# Altium PCB PCB_combo_ver2.PcbDoc
Units mm, origin at the board's own origin, x right, y up, seen from the top; angles counter-clockwise.
Board outline 175 x 85 mm, 2 copper layers (Top Layer, Bottom Layer); 57 components, 37 nets, 169 pads, 7 vias.
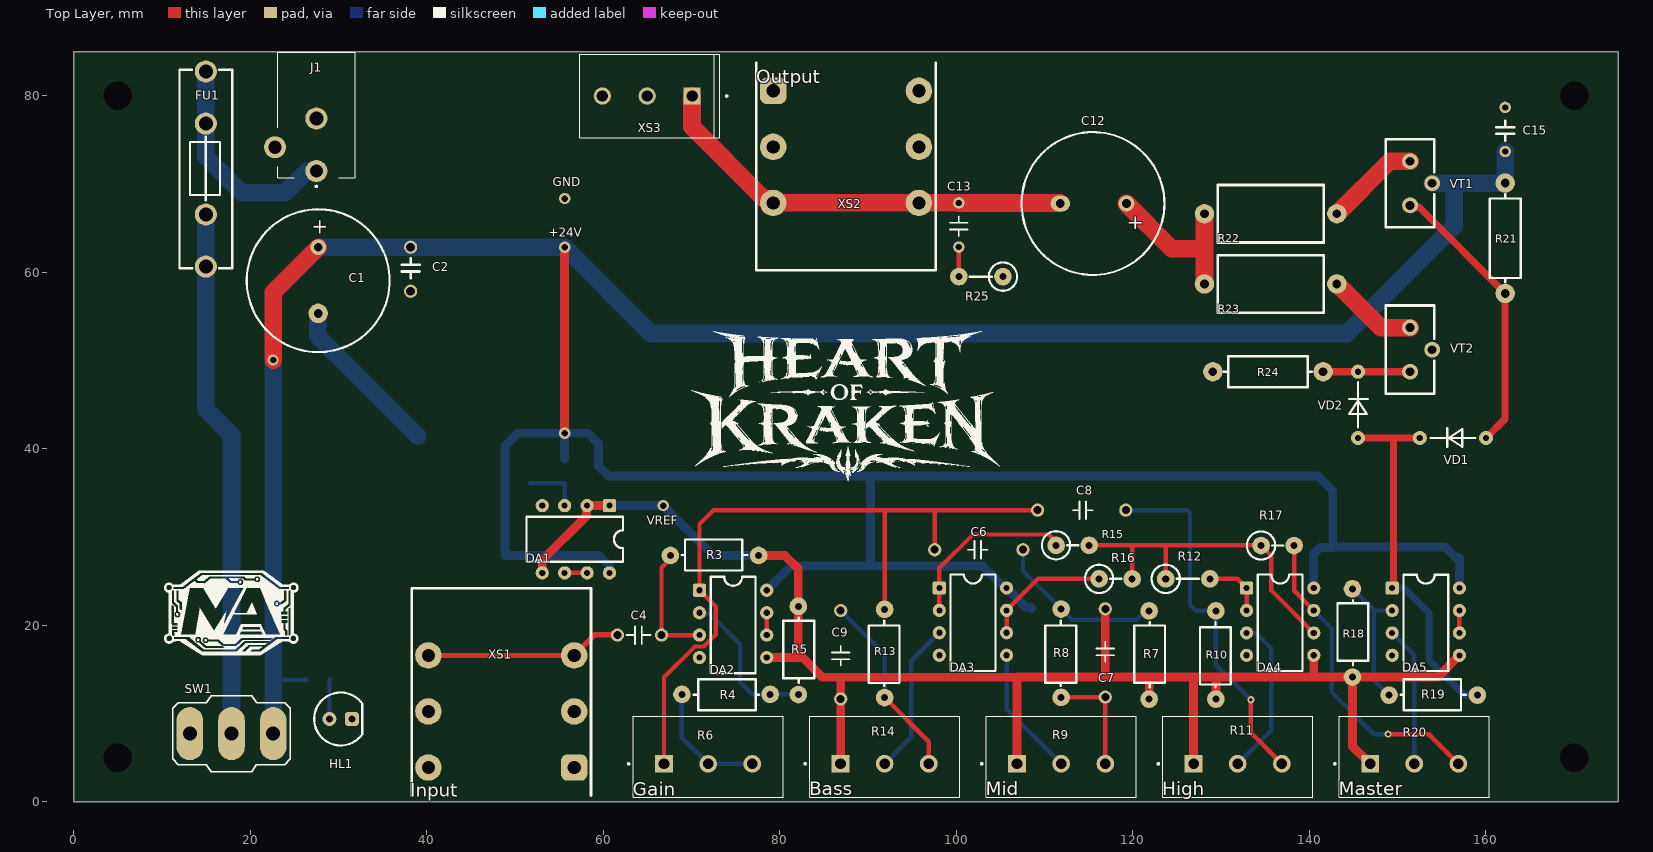
[diagram p0: Top Layer view]
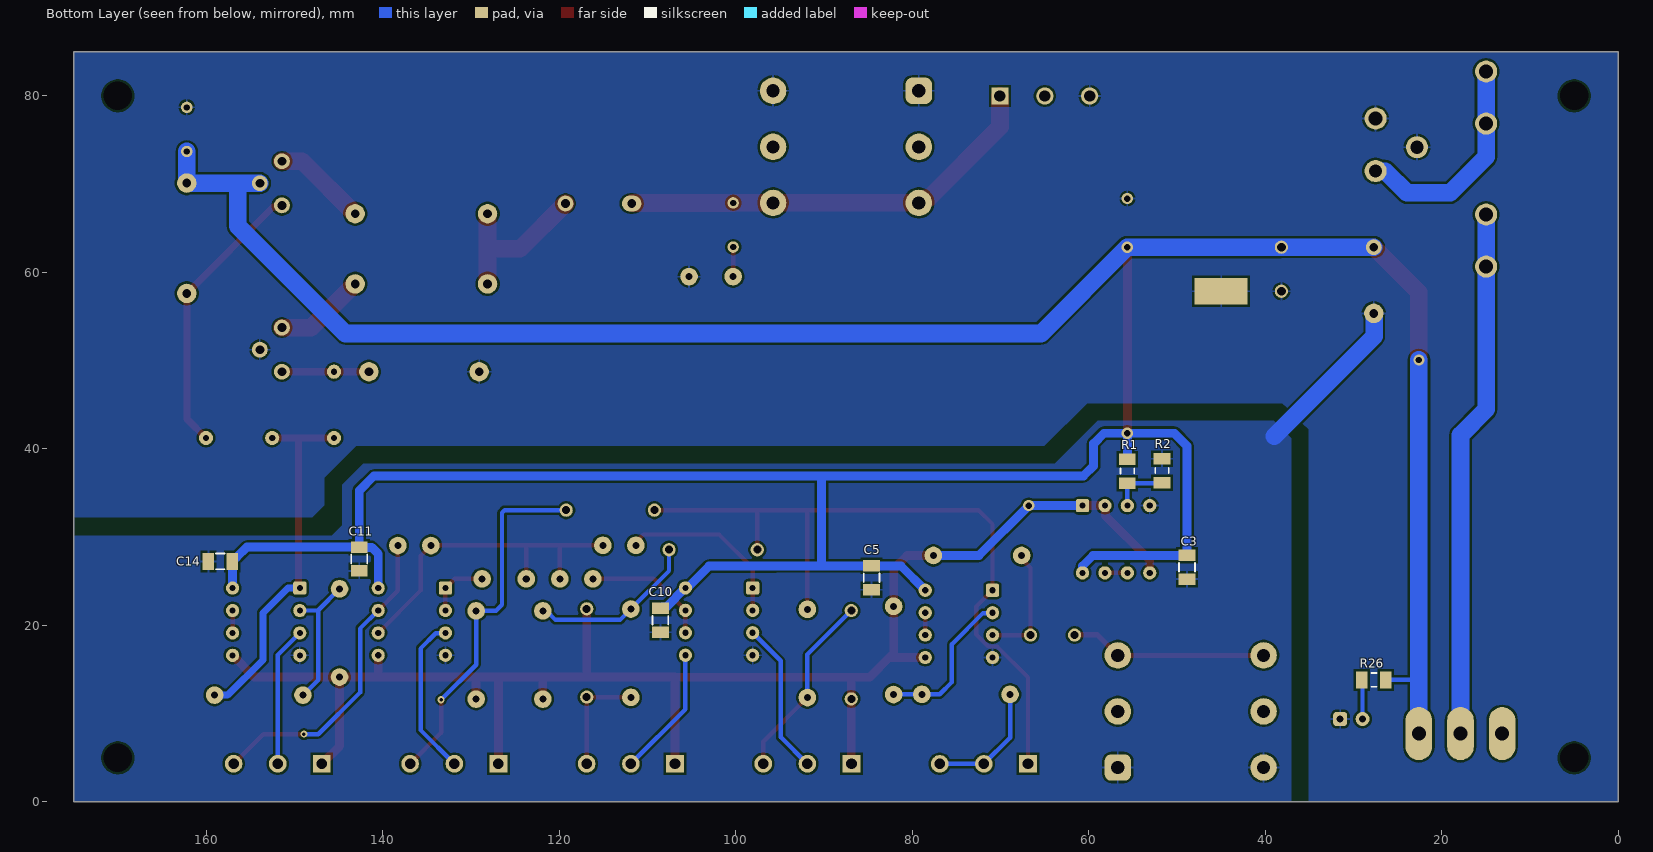
[diagram p1: Bottom Layer view, seen from below]
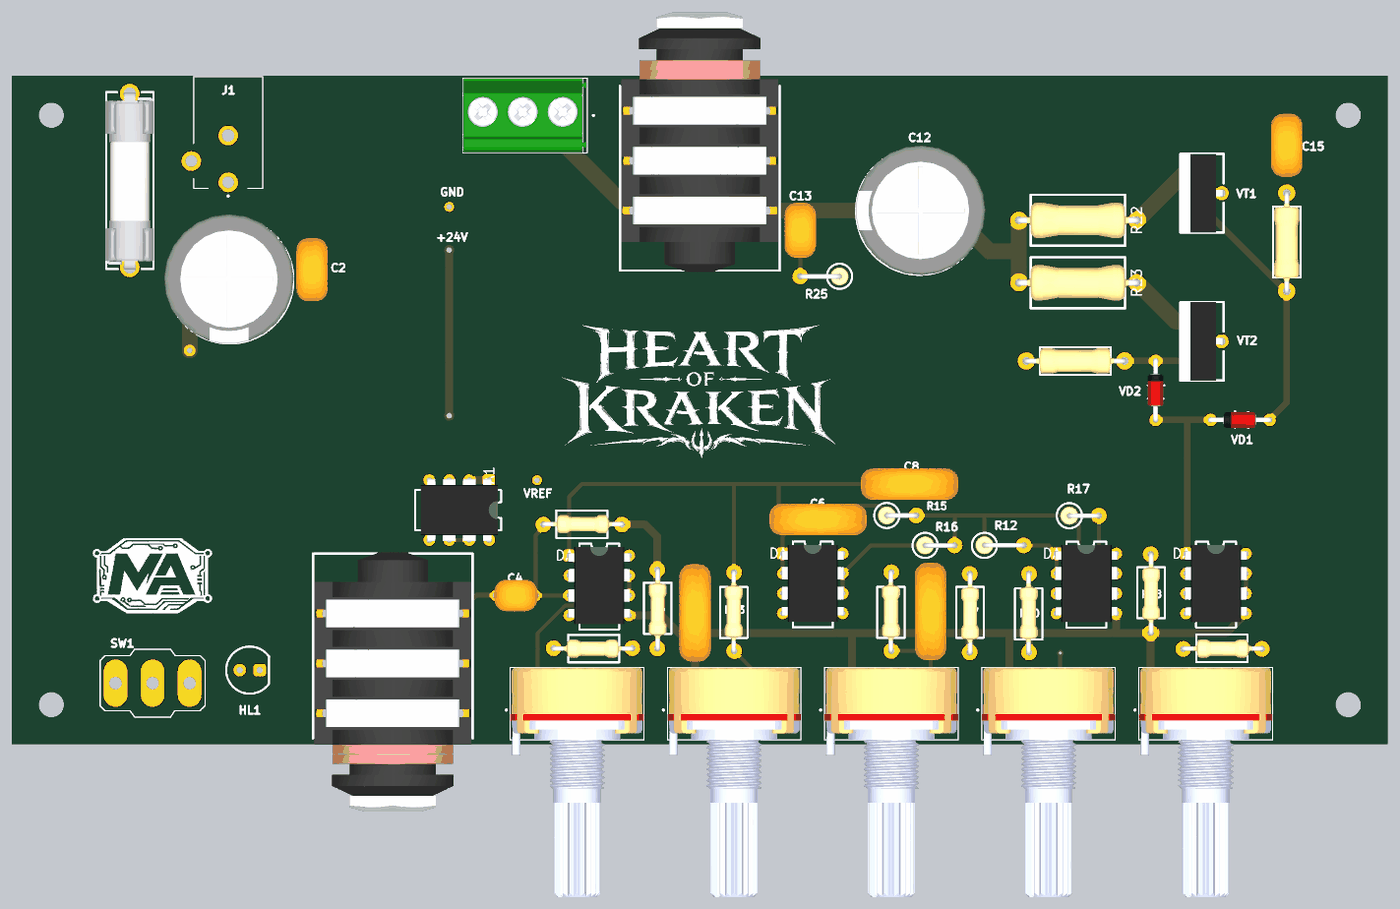
[diagram p2: 3D render of the assembled board from above, using the file's embedded part models]
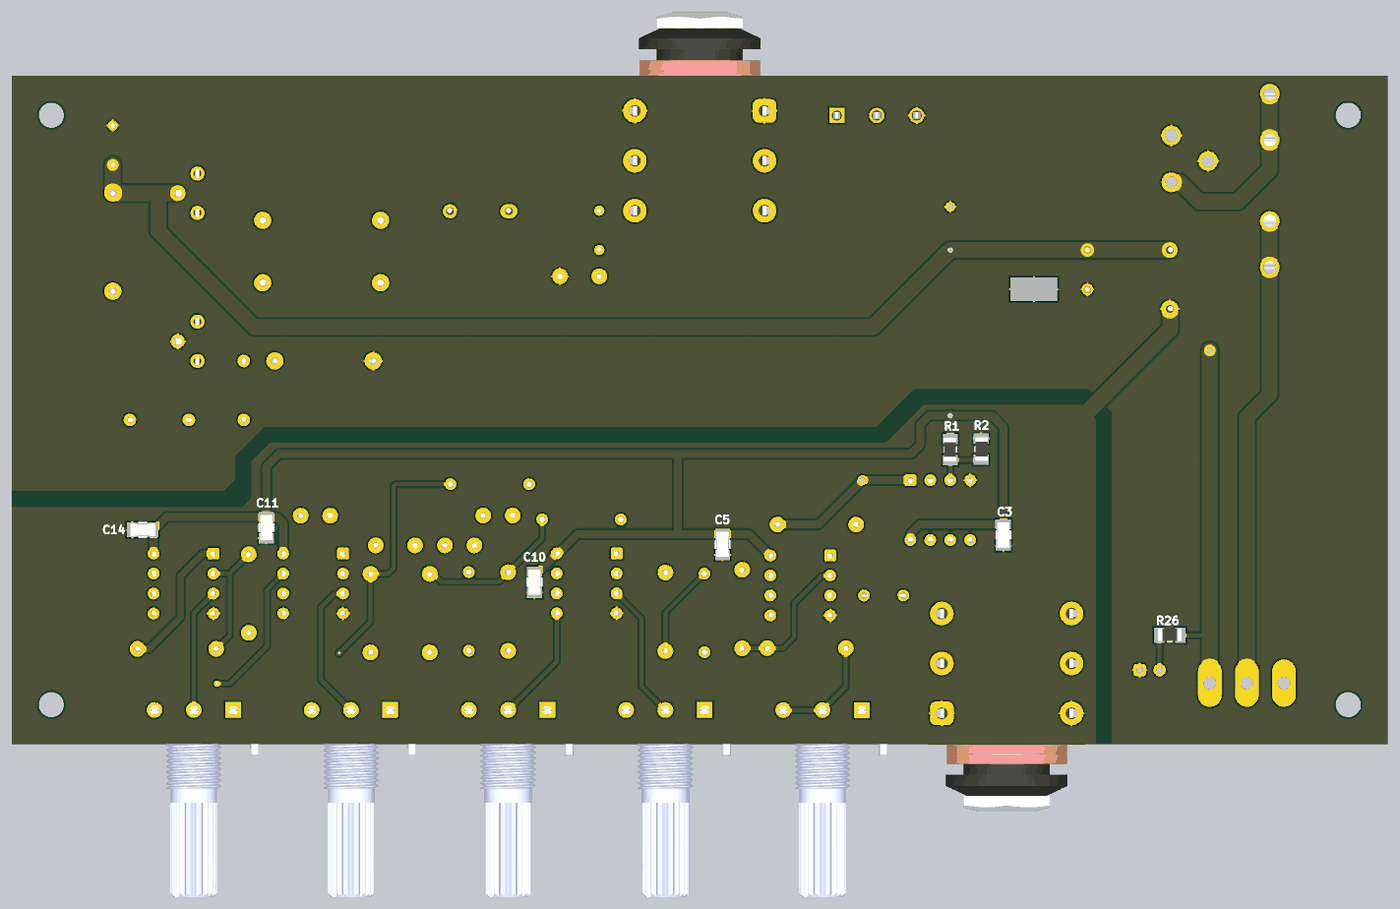
[diagram p3: 3D render of the assembled board from below, using the file's embedded part models]

## Layer stack, top to bottom
Top Solder: solder mask 0.0102, Solder Resist, Dk 3.5
Top Layer: signal copper 0.0356
Dielectric 1: dielectric 0.32, FR-4, Dk 4.8
Bottom Layer: signal copper 0.0356
Bottom Solder: solder mask 0.0102, Solder Resist, Dk 3.5

## Board outline
0,0 175,0 175,85 0,85

## Design rules (kind name [scope] priority, off if disabled: settings)
Clearance [All] p1: gap=0.254 ignorepadtopadclearanceinfootprint=FALSE
Height [All] p1: minheight=0 maxheight=45 prefheight=12.7
PolygonConnect [All] p1: connectstyle=Relief reliefconductorwidth=0.254 reliefentries=4 polygonreliefangle="90 Angle" airgapwidth=0.254
RoutingVias [All] p1: holewidth=0.711 width=1.27 viastyle="Through Hole" minholewidth=0.711 minwidth=1.27 maxholewidth=0.711 maxwidth=1.27
SolderMaskExpansion [All] p1: expansion=0.102 istentingtop=FALSE
SupplyNets "Schematic Supply Nets" [InNet('GND')] p1: voltage=0.000
Width [All] p1: maxlimit=3 minlimit=0.254 preferedwidth=0.5
29 further rules are at their usual default settings.

## Components (designator, comment, footprint, x,y, rotation, side; value= is the part's Value field where it differs from the comment)
C1 "2200uF 35V" "capr- 7.5D16.5H35"#1 27.704,55.35 r270 top
C2 "100nF 50V" "C__s 5-d 8-t4"#1 38.175,62.85 r270 top
C3 "100nF" "cap 1206 3D" 48.875,27.925 r180 bottom
C4 "1uF" "C__s 5-d 5.5-t4" 66.6,18.9 r180 top
C5 "100nF" "cap 1206 3D" 84.6,26.725 r180 bottom
C6 "47nF" C__s10-d12.4-t4 97.55,28.575 r0 top
C7 "2.2nF" C__s10-d12.4-t4 116.875,21.875 r270 top
C8 "2.2nF" C__s10-d12.4-t4 119.204,33.057 r180 top
C9 "47nF" C__s10-d12.4-t4 86.9,11.675 r90 top
C10 "100nF" "cap 1206 3D" 108.525,21.9 r180 bottom
C11 "100nF" "cap 1206 3D" 142.65,28.85 r180 bottom
C12 "2200uF 35V" "capr- 7.5D16.5H35"#2 111.781,67.792 r180 top
C13 "100nF" "C__s 5-d 7-t4" 100.282,67.862 r270 top
C14 "100nF" "cap 1206 3D" 157.05,27.25 r270 bottom
C15 "100nF 50V" "C__s 5-d 8-t4"#2 162.182,73.687 r90 top
DA1 "ОУ х 2 (1)" DIP-8 60.705,33.57 r270 top
DA2 "ОУ х 2 (1)" DIP-8 70.9,23.98 r0 top
DA3 "ОУ х 2 (1)" DIP-8 98.075,24.245 r0 top
DA4 "ОУ х 2 (1)" DIP-8 132.88,24.23 r0 top
DA5 "ОУ х 2 (1)" DIP-8 149.375,24.225 r0 top
FU1 "1.6A 5x20 mm" FU_FC-001-N(DH) 14.975,82.75 r270 top
HL1 "???" "СД_D5_8.6_Y кр" 31.515,9.4 r180 top
J1 "EJ508A" MPD_EJ508A 27.5,74.175 r180 top
R1 "10K" "Res_1206 3D" 55.625,36.175 r0 bottom
R2 "10K" "Res_1206 3D" 51.7,38.825 r180 bottom
R3 "10K" "RES 0.25  L10" 77.6,27.925 r270 top
R4 "10K" "RES 0.25  L10" 68.914,12.192 r90 top
R5 "10K" "RES 0.25  L10" 82.097,12.165 r180 top
R6 "50K" TRIM_WH148-1A-2-18T-L20 71.882,4.318 r0 top
R7 "9.1K" "RES 0.25  L10" 121.85,11.65 r180 top
R8 "7.5K" "RES 0.25  L10" 111.875,21.85 r0 top
R9 "50K" TRIM_WH148-1A-2-18T-L20 111.875,4.325 r0 top
R10 "10K" "RES 0.25  L10" 129.4,21.65 r0 top
R11 "50K" TRIM_WH148-1A-2-18T-L20 131.875,4.325 r0 top
R12 "9.1K" "RES 0.25  L 5" 123.725,25.275 r90 top
R13 "7.5K" "RES 0.25  L10" 91.875,21.825 r0 top
R14 "50K" TRIM_WH148-1A-2-18T-L20 91.875,4.325 r0 top
R15 "6.8K" "RES 0.25  L 3,75" 111.3,29.075 r90 top
R16 "7.5K" "RES 0.25  L 3,75" 116.175,25.275 r90 top
R17 "10K" "RES 0.25  L 3,75" 134.525,29.05 r90 top
R18 "10K" "RES 0.25  L10" 144.875,14.146 r180 top
R19 "22K" "RES 0.25  L10" 159.025,12.1 r270 top
R20 "50K" TRIM_WH148-1A-2-18T-L20 151.875,4.325 r0 top
R21 "330R" "RES 0.5  L12,5" 162.182,57.612 r180 top
R22 "0.47R" "RES 1,0  L15" 143.107,66.637 r270 top
R23 "0.47R" "RES 1,0  L15" 143.107,58.687 r270 top
R24 "330R" "RES 0.5  L12,5" 129.057,48.737 r90 top
R25 "10R" "RES 0.25  L 5" 105.282,59.512 r270 top
R26 "10K" "Res_1206 3D" 29,13.825 r90 bottom
SW1 "MTS103" MTS103 17.882,7.737 r90 top
VD1 "Диод.  x1  (2)" "DO-35  (7.5)" 160.007,41.237 r180 top
VD2 "Диод.  x1  (2)" "DO-35  (7.5)" 145.507,41.237 r90 top
VT1 "VT NPN" "TO-220 (Z)" 151.407,67.587 r90 top
VT2 "VT PNP" "TO-220 (Z)" 151.407,48.737 r90 top
XS1 "NYS215" "Гнездо  NYS215" 56.7,3.9 r0 top
XS2 "NYS215" "Гнездо  NYS215" 79.25,80.562 r180 top
XS3 "MKDSN2,5/3-5.08" PHOENIX_MKDSN2,5/3-5.08 64.975,79.975 r180 top

## Footprints (in the part's own frame and the unit in brackets; to place one, negate y for a bottom-side part, rotate by r counter-clockwise, add the part's x,y. Pads: shape width x height; smd on the part's side, far side on the other; paste and mask are expansions set on the pad)
C__s10-d12.4-t4 [mm] "Конденсатор керамический дисковый"
  round 1.5 hole 0.9 mask+0.1: 1(0,0) 2(10,0)
  silkscreen extent 3.75,-1 6,1, body extent -1.2,-2 11.2,2, height 15.3
"C__s 5-d 5.5-t4" [mm] "Конденсатор керамический дисковый"
  round 1.5 hole 0.9 mask+0.1: 1(0,0) 2(5,0)
  silkscreen extent 1.25,-1 4,1, body extent -0.25,-2 5.25,2, height 8.45
"C__s 5-d 7-t4" [mm] "Конденсатор керамический дисковый"
  round 1.3 hole 0.7 mask+0.1: 1(0,0) 2(5,0)
  silkscreen extent 1.5,-1 3.75,1, body extent -1,-2 6,2, height 9.95
"C__s 5-d 8-t4"#1 [mm] "Конденсатор керамический дисковый"
  round 1.5 hole 1 mask+0.1: 1(0,0) 2(5,0)
  silkscreen extent 1.25,-1 3.5,1, body extent -1.5,-2 6.5,2, height 11
"C__s 5-d 8-t4"#2 [mm] "Конденсатор керамический дисковый"
  round 1.3 hole 0.7 mask+0.1: 1(0,0) 2(5,0)
  silkscreen extent 1.25,-1 3.5,1, body extent -1.5,-2 6.5,2, height 11
"cap 1206 3D" [mm] "Конденсатор керамический ЧИП (SMD)"
  rect 1.9x1.3 smd: 1(0,0.025) 2(0,-2.675)
  silkscreen extent -0.9,-1.83 0.9,-0.83, body extent -0.8,-2.93 0.8,0.27, height 1.4
"capr- 7.5D16.5H35"#1 [mm] "Конденсатор электролитический алюминиевый"
  round 2.2 hole 1: 1(0,0)
  round 1.8 hole 1: 2(-7.5,0)
  silkscreen extent -11.79,-8.09 4.39,8.09, body extent -12.05,-8.35 4.45,8.15, height 35.5
"capr- 7.5D16.5H35"#2 [mm] "Конденсатор электролитический алюминиевый"
  oval 2.2x1.8 hole 1: 1(0,0)
  round 1.8 hole 1: 2(-7.5,0)
  silkscreen extent -11.79,-8.09 4.39,8.09, body extent -12.05,-8.35 4.45,8.15, height 35.5
DIP-8 [mm]
  rrect30% 1.5x1.5 hole 0.7: 1(0,0)
  round 1.5 hole 0.7: 2(0,-2.54) 3(0,-5.08) 4(0,-7.62) 5(7.62,-7.62) 6(7.62,-5.08) 7(7.62,-2.54) 8(7.62,0)
  silkscreen extent 1.27,-9.4 6.35,1.52, body extent -0.15,-8.71 7.77,1.09, height 4.4
"DO-35  (7.5)" [mm]
  round 1.6 hole 0.7: 1(7.5,0) 2(0,0)
  silkscreen extent 1.2,-1.1 6.3,1, body extent -0.25,-1 7.85,1, height 2
FU_FC-001-N(DH) [mm]
  round 2.5 hole 1.6: 1(0,0) 1(5.9,0) 2(16.2,0) 2(22.1,0)
  silkscreen extent -0.2,-3 22.3,3, body extent -0.15,-3.1 22.35,3.1, height 10.1
MPD_EJ508A [mm]
  round 2.5 hole 1.5: 1(0,2.705) 3(4.69,0)
  round 2.5 hole 1.6: 2(0,-3.25)
  silkscreen extent -4.4,-10.74 4.4,4.55
MTS103 [mil]
  oval 237x118.5 hole 62.99: 1(0,185.56) 2(0,0) 3(0,-185.56)
  silkscreen extent -170,-263 170,263
PHOENIX_MKDSN2,5/3-5.08 [mm]
  rect 1.95x1.95 / inner round 1.95 / far side rect 1.95x1.95 hole 1.3: 1(-5.08,0)
  round 1.95 hole 1.3: 2(0,0) 3(5.08,0)
  silkscreen extent -9.1,-4.75 7.62,4.75, body extent -8.19,-4.75 7.62,4.75, height 15.15
"RES 0.5  L12,5" [mm] "Резистор  МЛТ,  ОМЛТ,  С2-33Н"
  round 2.2 hole 1: 1(0,0) 2(0,-12.5)
  silkscreen extent -1.75,-11.25 1.75,-1.25, body extent -1.6,-12.75 1.6,0.35, height 4.97
"RES 0.25  L10" [mm] "Резистор  МЛТ,  ОМЛТ,  С2-33Н"
  round 2 hole 0.8: 1(0,0) 2(0,-10)
  silkscreen extent -1.8,-8.7 1.7,-1.3, body extent -1.2,-10.27 1.1,0.33, height 3.64
"RES 0.25  L 3,75" [mm] "Резистор  МЛТ,  ОМЛТ,  С2-33Н"
  round 2 hole 0.8: 1(0,0) 2(0,-3.75)
  silkscreen extent -1.6,-2.5 1.6,1.6, body extent -1.15,-4.05 1.15,1.15, height 11.3
"RES 0.25  L 5" [mm] "Резистор  МЛТ,  ОМЛТ,  С2-33Н"
  round 2 hole 0.8: 1(0,0) 2(0,-5)
  silkscreen extent -1.6,-3.75 1.6,1.6, body extent -1.13,-5.3 1.18,1.15, height 10.8
"RES 1,0  L15" [mm] "Резистор  МЛТ,  ОМЛТ,  С2-33Н"
  round 2.2 hole 1: 1(0,0) 2(0,-15)
  silkscreen extent -3.25,-13.5 3.25,-1.5, body extent -2.25,-15.4 2.25,0.4, height 5.75
"Res_1206 3D" [mm] "Резистор ЧИП (SMD)"
  rect 1.9x1.3 smd: 1(0,0.05) 2(0,-2.65)
  silkscreen extent -0.77,-1.6 0.78,-1, body extent -0.75,-2.8 0.85,0.2, height 0.63
"TO-220 (Z)" [mm] "TO-220AB   SC-46   2-10P1B"
  round 1.8 hole 1: 1(0,0) 2(2.5,-2.5) 3(5,0)
  silkscreen extent -2.5,-2.75 7.5,2.75, body extent -2.5,-2.75 7.51,2.76, height 26
TRIM_WH148-1A-2-18T-L20 [mm]
  rect 2x2 / inner round 2 / far side rect 2x2 hole 1.2 mask+0.102: 1(-5,0)
  round 2 hole 1.2 mask+0.102: 2(0,0) 3(5,0)
  silkscreen extent -9.1,-3.8 8.5,5.4, body extent -8.5,-23.8 8.5,5.4, height 21
"Гнездо  NYS215" [mm]
  rrect50% 3x3 hole 1.5: 1(0,0)
  round 3 hole 1.5: 2(0,6.35) 3(0,12.7) 4(-16.51,12.7) 5(-16.51,6.35) 6(-16.51,0)
  silkscreen extent -18.41,-3.17 1.91,20.32, body extent -18.25,-12.52 1.75,20.5, height 15.75
"СД_D5_8.6_Y кр" [mm] "Светодиод красный D5 H8.6  горизонт."
  rrect50% 1.6x1.6 hole 0.8: 1(0,0)
  round 1.6 hole 0.8: 2(2.54,0)
  silkscreen extent -1.19,-3 4.27,3, body extent -1.23,-0.2 4.27,13.68, height 6.46

## Part data
C1 C12: library part "C Al R", "Конденсатор алюминиевый радиальный"
C2 C4 C6 C7 C8 C9 C13 C15: library part C_Disk, "Конденсатор керамика"
C3 C5 C10 C11 C14: library part C, "Конденсатор керамика"
DA1 DA2 DA3 DA4 DA5: "NJM4558/4559  LM158х   LM258х   LM358х   LM2904х  TL072х   NE5532x   SA5532x  и другие"
FU1: library part "FU + Clip", "Предохранитель плавкий с держателем."
HL1: library part "D5  H8.6", "Св. д. D5 H8.6"
J1: "Power Barrel Connector Jack 2.10mm ID _0.083_, 5.50mm OD _0.217_ Through Hole, Right Angle", Package="Non-Standard MPD", Availability=Unavailable, MF=MPD, MP=EJ508A, Price=None, SnapEDA_Link=https://www.snapeda.com/parts/EJ508A/MPD%20%28Memory%20Protection%20Devices%29/view-part/474399/?ref=snap
R1 R2 R3 R26: library part R, "0805 10K"
R4 R5 R7 R8 R10 R12 R13 R15 R16 R17 R21 R22 R23 R24 R25: library part R, "R4"
R6 R9 R11 R14 R20: library part WH148-1A-2-18T-L20, "16mm Rotary Potentiometers", Package=Package, Check_prices=https://www.snapeda.com/parts/WH148-1A-2-18T-L20/Kls+electronics/view-part/?ref=eda, MF="Kls electronics", MP=WH148-1A-2-18T-L20, SnapEDA_Link=https://www.snapeda.com/parts/WH148-1A-2-18T-L20/Kls+electronics/view-part/?ref=snap
R18 R19: library part R, "Резисторы плёночные (SMD; МЛТ; С2-33Н; MP9xxx)"
SW1: "SW TOG 1P2T 6A ON-OFF-ON MINI SOL THR", Package=None, Check_prices=https://www.snapeda.com/parts/MTS-103/CIF/view-part/?ref=eda, MF="Not Specified", MP=MTS-103, SnapEDA_Link=https://www.snapeda.com/parts/MTS-103/CIF/view-part/?ref=snap
VD1 VD2: "Диод  одиночный"
VT1: "Транзистор NPN"
VT2: "Транзистор PNP"
XS1 XS2: library part "NYS 215", "Гнездо аудио стерео"
XS3: "HEADER, PCB, SCREW, 5.08MM, 3WAY; Connector Type: PCB; Series: MKDSN 2, 5; Connector Mounting: PCB; Pitch Spacing: 5....", Package=None, Availability="Not in stock", Check_prices=https://www.snapeda.com/parts/MKDSN2,5/3-5.08/Phoenix+Contact/view-part/?ref=eda, MF="Phoenix Contact", MP=MKDSN2,5/3-5.08, Price=None, SnapEDA_Link=https://www.snapeda.com/parts/MKDSN2,5/3-5.08/Phoenix+Contact/view-part/?ref=snap

## Free pads (board coordinates)
  round 0 hole 3.2 unplated: 25(5,5) 25(5,80) 25(170,5) 25(170,80)
  rect 6x3 smd far side: 38(45,57.85)

## Via types
v1: diameter 1.27, hole 0.711, Top Layer to Bottom Layer, 4 vias
v2: diameter 1.27, hole 0.711, Top Layer to Bottom Layer, tented both sides, 1 vias
v3: diameter 0.8, hole 0.4, Top Layer to Bottom Layer, 1 vias
v4: diameter 0.8, hole 0.4, Top Layer to Bottom Layer, tented both sides, 1 vias

## Nets (pads, with @x,y where several pads share a name; then routed paths per layer and width w, separated by ;. In a path a pad name is that pad's centre, name@x,y a point inside that pad or via, vN(x,y) a via of type N, cw(c..) or ccw(c..) an arc to the next point about the centre after c; other vN are vias at no path point)
+24: C1.2 C2.1 C3.1 C5.1 C10.1 C11.1 C14.1 C15.1 DA1.8 DA2.8 DA3.8 DA4.8 DA5.8 R1.2 R21.2 R26.2 SW1.3 VT1.2 | length 437.7
  Top Layer w1: v2(55.625,41.775) v1(55.625,62.85)
  Top Layer w2: v1(22.6,50.075) 22.6,57.746 C1.2
  Bottom Layer w0.5: SW1.3 SW1.3@22.598,7.739 ; v1@22.598,50.073 v1(22.6,50.075) ; 22.695,13.825 R26.2 ; C11.1@142.618,28.843 C11.1 ; VT1.2 VT1.2@153.919,70.099 ; R21.2@162.169,70.099 R21.2
  Bottom Layer w1: R1.2 v2(55.625,41.775) ; DA1.8 60.705,26.735 59.515,27.925 48.875,27.925 48.875,40.35 50.3,41.775 v2(55.625,41.775) ; DA2.8 81.265,26.725 84.15,26.725 95.4,26.725 103.005,26.725 105.235,24.495 105.31,24.495 105.56,24.245 DA3.8 107.865,22.075 108.375,22.075 C10.1 ; 90.275,26.75 90.275,36.925 ; DA4.8 140.5,28.1 141.243,28.843 C11.1@142.618,28.843 ; DA5.8 156.995,27.58 156.875,27.7 156.545,27.7 155.37,28.875 C11.1 142.65,35.275 141,36.925 90.275,36.925 ; v2(55.625,41.775) 58.275,41.775 59.45,40.6 59.45,38.075 60.6,36.925 90.275,36.925
  Bottom Layer w2: SW1.3@22.598,7.739 v1@22.598,50.073 ; C1.2 C2.1 v1(55.625,62.85) 65.413,53.062 144.207,53.062 156.4,65.255 156.4,70.05 ; VT1.2@153.919,70.099 R21.2@162.169,70.099 ; R21.2 C15.1
GND: C1.1 C2.2 C3.2 C5.2 C10.2 C11.2 C14.2 C15.2 DA1.4 DA2.4 DA3.4 DA4.4 DA5.4 HL1.1 J1.2 J1.3 pad.38 R2.1 R24.1 R25.1 VT2.2 XS1.1 XS1.6 XS2.1 XS2.6 XS3.3 | length 18.6
  Bottom Layer w2: C1.1@27.65,55.35 27.65,52.75 38.975,41.425
  other v1: 55.625,68.35
HPF1: DA4.3 R11.2 | length 18.2
  Bottom Layer w0.5: R11.2 135.7,8.15 135.7,17.375 133.963,19.112 132.918,19.112 DA4.3
HPF2: DA4.6 R12.1 R15.2 R16.2 R17.1 | length 39.5
  Top Layer w0.5: R15.2 119.95,29.075 ; R16.2 119.925,29.05 119.95,29.075 ; R12.1 123.725,29.025 123.675,29.075 ; R17.1@134.5,29.075 123.675,29.075 ; R17.1 135.7,27.875 135.7,23.95 DA4.6 ; 119.95,29.075 123.675,29.075
LPF1: DA3.3 R14.2 | length 17.4
  Bottom Layer w0.5: R14.2 94.9,7.35 94.9,15.99 DA3.3
MPF1: DA3.5 R9.2 | length 14.9
  Bottom Layer w0.5: DA3.5 105.695,10.505 R9.2
NetC4_1: C4.1 DA2.3 R3.2 | length 13.7
  Top Layer w0.5: R3.2 67.6,27.519 66.6,26.519 C4.1 DA2.3
NetC4_2: C4.2 XS1.3 XS1.4 | length 22.4
  Top Layer w0.6: XS1.4 XS1.3 59.025,18.925 C4.2@61.6,18.925
NetC6_2: C6.2 R7.2 R8.1 | length 19.4
  Bottom Layer w0.5: C6.2 107.55,26.175 R8.1 113.104,20.621 120.415,20.621 121.444,21.65 R7.2
NetC7_2: C7.2 R8.2 R9.3 | length 12.6
  Top Layer w0.5: R8.2 111.888,11.863 116.863,11.863 C7.2 R9.3
NetC8_1: C8.1 R10.1 R11.3 | length 41.5
  Top Layer w0.5: v4(133.375,11.575) 133.375,7.825 R11.3
  Bottom Layer w0.5: C8.1 126.182,33.057 126.475,32.764 126.475,22.325 127.15,21.65 R10.1 129.4,15.55 v4(133.375,11.575)
NetC9_2: C9.2 R13.2 R14.3 | length 21.5
  Top Layer w0.5: R13.2 96.875,6.825 R14.3
  Bottom Layer w0.5: C9.2 91.875,16.7 R13.2
NetC12_1: C12.1 C13.1 XS2.3 XS2.4 XS3.1 | length 48.7
  Top Layer w2: XS3.1 70.055,76.489 78.144,68.4 78.479,68.4 78.979,67.9 95.76,67.9 C13.1@100.282,67.9 ; C13.1 C12.1@111.681,67.862
NetC12_2: C12.2 R22.2 R23.2 | length 18.9
  Top Layer w2: C12.2 124.411,62.662 128.107,62.662 ; R23.2 128.107,62.662 ; R22.2 128.107,62.662
NetC13_2: C13.2 R25.2 | length 3.4
  Top Layer w0.5: R25.2 C13.2
NetDA1_3: DA1.3 R1.1 R2.2 | length 6.5
  Bottom Layer w0.5: R2.2 51.75,36.125 R1.1 DA1.3
NetDA1_6: DA1.6 DA1.7 | length 2.5
  Top Layer w0.5: DA1.6 DA1.7
NetDA2_2: DA2.2 R4.2 R5.1 | length 18
  Top Layer w0.5: R4.2 R4.2@78.918,12.196 ; R5.1@82.093,12.196 82.097,12.2 R5.1@82.525,12.2
  Bottom Layer w0.5: DA2.2 70.943,21.397 71.978,21.397 75.5,17.875 75.5,13.575 76.883,12.192 R4.2 ; R4.2@78.918,12.196 R5.1@82.093,12.196
NetDA2_6: DA2.6 DA2.7 | length 2.5
  Top Layer w0.5: DA2.6 DA2.7
NetDA3_1: DA3.1 DA3.2 R15.1 | length 20.3
  Top Layer w0.5: DA3.2 DA3.1 98.075,26.5 101.875,30.3 110.464,30.3 111.3,29.464 R15.1
NetDA3_6: DA3.6 DA3.7 R16.1 | length 14.5
  Top Layer w0.5: DA3.6 DA3.7 109.265,25.275 R16.1
NetDA4_1: DA4.1 DA4.2 R12.2 | length 7.1
  Top Layer w0.5: R12.2 131.835,25.275 DA4.1 DA4.2
NetDA4_7: DA4.7 R17.2 R20.3 | length 36.1
  Top Layer w0.5: R17.2 138.275,23.915 DA4.7 ; v3(148.925,7.675) 153.525,7.675 R20.3
  Bottom Layer w0.5: DA4.7 142.55,19.64 142.55,12.4 147.275,7.675 v3(148.925,7.675)
NetDA5_1: DA5.1 R19.1 VD1.1 VD2.2 | length 42
  Top Layer w0.8: VD2.2 149.507,41.237 ; DA5.1@149.132,24.468 DA5.1 ; DA5.1@149.507,24.357 149.507,41.237 ; VD1.1 149.507,41.237
  Bottom Layer w0.8: DA5.1 150.719,24.225 153.55,21.394 153.55,16.1 157.55,12.1 R19.1
NetDA5_2: DA5.2 R18.2 R19.2 | length 15.9
  Bottom Layer w0.5: R18.2 147.3,21.721 ; R19.2 147.3,13.825 147.3,21.721 ; DA5.2 147.336,21.685 147.3,21.721
NetDA5_6: DA5.6 DA5.7 | length 2.5
  Top Layer w0.5: DA5.6 DA5.7
NetFU1_1: FU1.1 J1.1 | length 24.9
  Bottom Layer w2: FU1.1@14.975,82.75 14.975,76.85 14.975,73.075 19.039,69.011 23.941,69.011 26.4,71.47 J1.1
NetFU1_2: FU1.2 SW1.2 | length 60
  Bottom Layer w2: FU1.2@14.975,66.55 14.975,60.65 14.975,44.469 17.882,41.562 SW1.2
NetHL1_2: HL1.2 R26.1 | length 4.4
  Bottom Layer w0.5: HL1.2 28.988,9.413 28.988,13.812 R26.1@29,13.825
NetR4_1: R4.1 R6.2 R6.3 | length 14.1
  Bottom Layer w0.5: R4.1 68.914,7.286 R6.2 R6.3
NetR21_1: R21.1 VD1.2 VT1.1 | length 32.2
  Top Layer w0.8: VT1.1 151.598,67.396 152.398,67.396 R21.1 162.182,43.412 VD1.2
NetR22_1: R22.1 VT1.3 | length 10.7
  Top Layer w2: R22.1@143.132,66.612 149.107,72.587 VT1.3
NetR23_1: R23.1 VT2.3 | length 10.3
  Top Layer w2: R23.1@143.132,58.712 148.107,53.737 VT2.3
NetR24_2: R24.2 VD2.1 VT2.1 | length 9.8
  Top Layer w0.8: R24.2 VT2.1
Sum_out: DA5.3 R20.2 | length 15.9
  Bottom Layer w0.5: DA5.3 151.875,16.645 R20.2
VGS1: C6.1 C8.2 DA2.1 R6.1 R13.1 | length 85.6
  Top Layer w0.5: R6.1 66.882,14.115 70.381,17.614 71.387,17.614 72.725,18.952 72.725,22.155 DA2.1 70.9,31.475 72.482,33.057 97.542,33.057 ; R13.1 91.875,33.025 ; C6.1@97.542,28.575 97.542,33.057 ; C8.2 97.542,33.057
Virt_GND: C7.1 C9.1 DA1.1 DA1.2 DA1.5 DA2.5 DA4.5 DA5.5 R3.1 R5.2 R7.1 R9.1 R10.2 R11.1 R14.1 R18.1 R20.1 | length 182
  Top Layer w1: DA1.5 53.085,27.41 58.114,32.439 58.114,33.519 DA1.2 DA1.1 ; R3.1 80.575,27.925 82.097,26.403 R5.2 82.097,16.853 82.59,16.36 ; DA2.5 82.59,16.36 ; R14.1 86.9,4.35 C9.1 86.9,13.561 ; R9.1 106.875,14.121 ; C7.1 116.875,14.146 ; R7.1 121.85,14.134 121.863,14.146 ; R11.1 126.875,14.121 126.85,14.146 ; R10.2 129.4,14.121 129.375,14.146 ; DA4.5 140.5,14.196 140.45,14.146 ; R20.1 144.875,6.325 R18.1 ; DA5.5 154.536,14.146 R18.1 ; 82.59,16.36 84.829,14.121 106.875,14.121 ; 106.875,14.121 106.9,14.146 116.875,14.146 ; 116.875,14.146 121.863,14.146 ; 121.863,14.146 126.85,14.146 ; 126.85,14.146 129.375,14.146 ; 129.375,14.146 140.45,14.146 ; 140.45,14.146 R18.1
  Bottom Layer w1: DA1.1 v1(66.805,33.57) 72.45,27.925 R3.1
pads on no net: SW1.1 XS1.2 XS1.5 XS2.2 XS2.5 XS3.2

## Polygon pours and split planes (outlines as drawn)
GND on Bottom Layer "NONET_L02_P-001" (solid, remove dead copper, pour order 1): 35.075,0 0,0 0,85 175,85 175,32.15 174.925,32.225 147.997,32.225 146.592,33.63 146.592,36.708 142.975,40.325 65.025,40.325 60.175,45.175 38.05,45.175 35.075,42.2
GND on Bottom Layer "NONET_L02_P-001" (solid, remove dead copper, pour order 0): 37.075,0 37.075,41.2 39.05,43.175 58.975,43.175 60.95,41.2 63.825,38.325 142.175,38.325 144.575,35.925 144.575,31.325 145.75,30.15 175,30.15 175,0

## Silkscreen, mask and mechanical layers (free items; w line width, h text height)
Top Overlay:
  drawing of 57 lines, arcs and shapes, not listed
  text "Output" at 77.35,81.405 h1.52
  text "GND" at 54.304,69.754 h1
  text "+24V" at 53.804,64.004 h1
  text "VREF" at 64.929,31.404 h1
  text "Bass" at 83.325,0.734 h1.52
  text "Mid" at 103.325,0.734 h1.52
  text "High" at 123.306,0.73 h1.52
  text "Master" at 143.325,0.734 h1.52
  text "Gain" at 63.362,0.673 h1.52
  text "Input" at 38.125,0.605 h1.52
Mechanical 1:
  the board outline again, w0.254

## Text inside footprints (layer, text, board x,y; h text height)
C1: Top Overlay "+" at 26.554,66.15 h3 r270; Top Assembly "+" at 26.604,66.15 h3 r270
C12: Top Overlay "+" at 121.306,66.892 h3 r180; Top Assembly "+" at 121.381,67.492 h3 r180
HL1: Top Assembly "+" at 29.229,11.94 h3.5 r180